# EAGLE board DressCode (EAGLE 6.4)
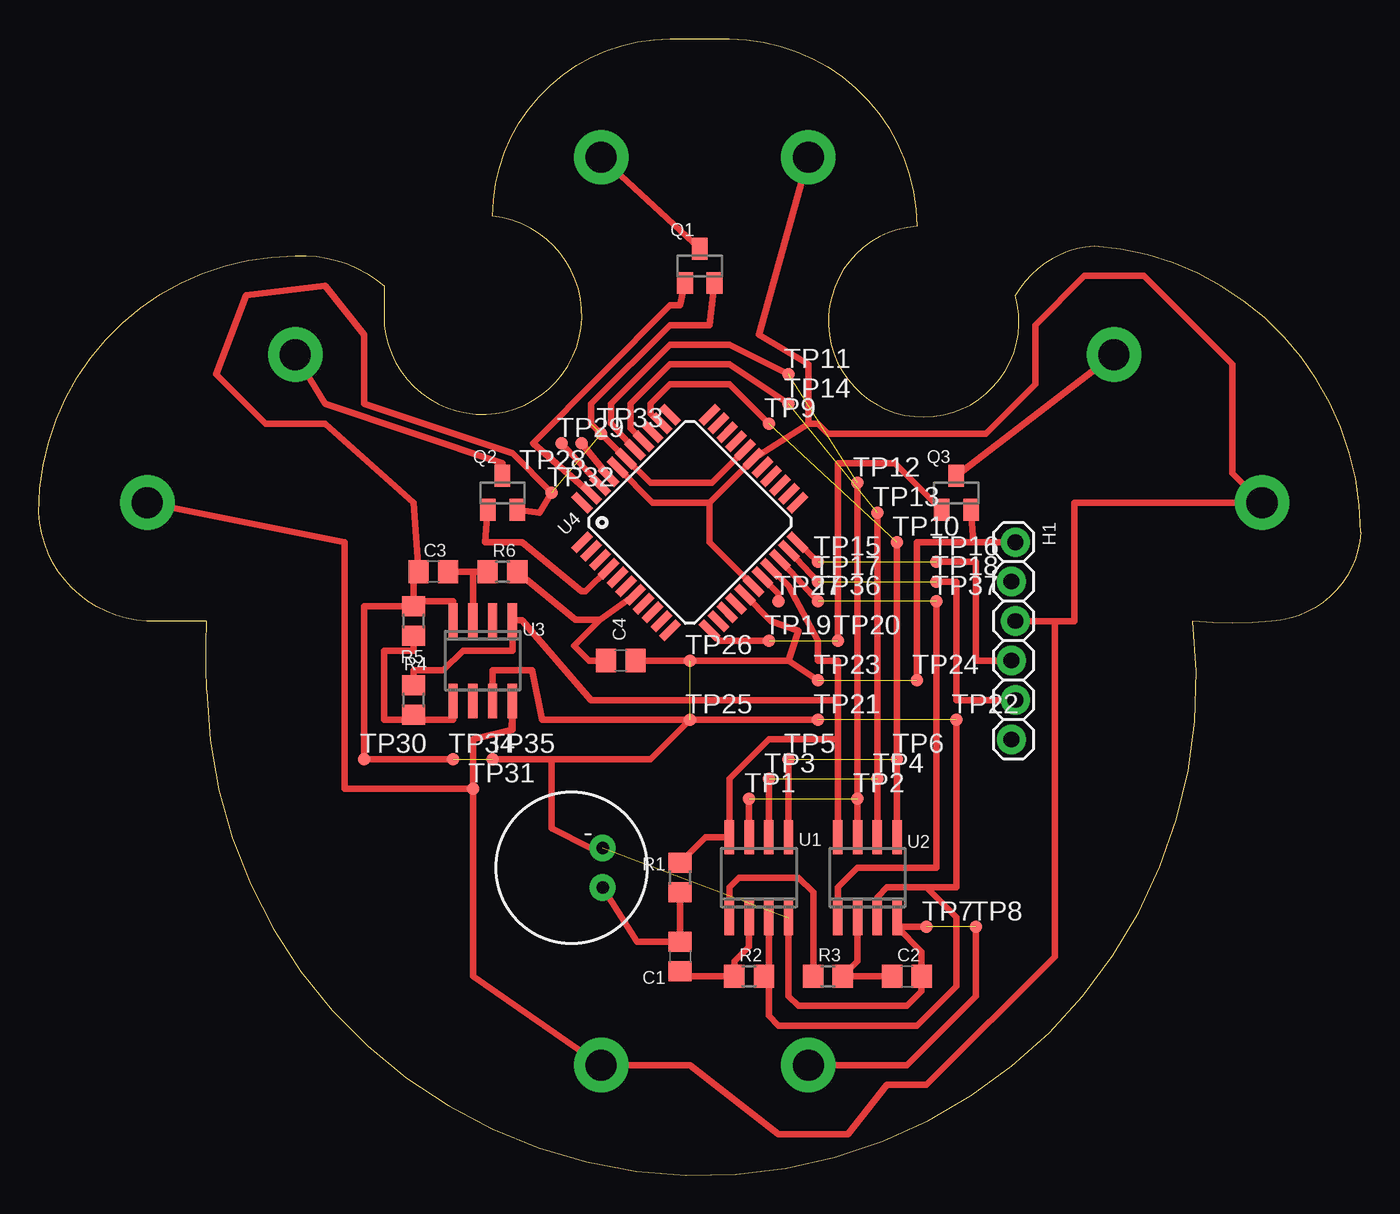
[diagram p0: board, top side]

Size 85.09 x 73.12 mm. Coordinates in mm from the lower left corner, seen from the top.
Outline: 22.22,54.7 arc259 29.21,61.69 arc-90 40.64,73.12 44.45,73.12 arc-90 56.52,61.05 arc282 62.87,56.61 arc-56 67.95,59.78 arc-86 85.09,41.37 arc-83 79.38,35.65 arc-13 74.3,35.65 arc-186 10.8,31.21 arc-2 10.8,35.65 7.62,35.65 arc-90 0,42.64 arc-90 16.51,59.15 arc-44 22.22,57.24 22.22,54.7
Copper layers (1*16): Top 0.035mm / dielectric 1.5mm / Bottom 0.035mm
Design rules "default *": minimum track width 0.2mm, minimum drill 0.5mm, track to track 0.2mm, track to pad 0.4mm, pad to pad 0.2mm, via to via 0.2mm, smd to smd 0.2mm, copper to edge 0.2mm, drill to drill 0.3mm, minimum pad ring 10mil, minimum via ring 8mil, stop-mask expansion 4mil, vias tented up to drill 1mm, thermal gap 0.2mm

## Footprints (pad centres in the part's own frame; a part is rotated, then mirrored left to right if it is on the bottom)
C0805 = smd 1.3 x 1.5: 1 -0.95,0; 2 0.95,0
1X06_LOCK = drill 1.016 pad 1.88: 1 0,0; 2 2.54,-0.254; 3 5.08,0; 4 7.62,-0.254; 5 10.16,0; 6 12.7,-0.254
MIC-9.7MM = drill 0.8 pad 1.676: 1 -2,1.27; 2 -2,-1.27
SOT23 = smd 1 x 1.4: 1 -0.95,-1.1; 2 0.95,-1.1; 3 0,1.1
R0805 = smd 1.3 x 1.5: 1 -0.95,0; 2 0.95,0
TP08R = smd 0.8 x 0.8: TP 0,0
SOIC-8 = smd 0.6 x 2.2: 1 -1.905,-2.6; 2 -0.635,-2.6; 3 0.635,-2.6; 4 1.905,-2.6; 5 1.905,2.6; 6 0.635,2.6; 7 -0.635,2.6; 8 -1.905,2.6
TQFP44 = smd 1.5 x 0.5: 1 -5.8,4; 2 -5.8,3.2; 3 -5.8,2.4; 4 -5.8,1.6; 5 -5.8,0.8; 6 -5.8,0; 7 -5.8,-0.8; 8 -5.8,-1.6; 9 -5.8,-2.4; 10 -5.8,-3.2; 11 -5.8,-4; 23 5.8,-4; 24 5.8,-3.2; 25 5.8,-2.4; 26 5.8,-1.6; 27 5.8,-0.8; 28 5.8,0; 29 5.8,0.8; 30 5.8,1.6; 31 5.8,2.4; 32 5.8,3.2; 33 5.8,4 | smd 0.5 x 1.5: 12 -4,-5.8; 13 -3.2,-5.8; 14 -2.4,-5.8; 15 -1.6,-5.8; 16 -0.8,-5.8; 17 0,-5.8; 18 0.8,-5.8; 19 1.6,-5.8; 20 2.4,-5.8; 21 3.2,-5.8; 22 4,-5.8; 34 4,5.8; 35 3.2,5.8; 36 2.4,5.8; 37 1.6,5.8; 38 0.8,5.8; 39 0,5.8; 40 -0.8,5.8; 41 -1.6,5.8; 42 -2.4,5.8; 43 -3.2,5.8; 44 -4,5.8

## Placement (x,y rotation side)
C1  10u  [C0805]  41.27,14.06 270 top
C2  10n  [C0805]  55.88,12.79 0 top
C3  10u  [C0805]  25.4,38.83 0 top
C4  10u  [C0805]  37.46,33.11 180 top
H1  [1X06_LOCK]  62.87,40.73 270 top
M1  MIC9.7MM  [MIC-9.7MM]  34.29,19.78 180 top
Q1  2N7002  [SOT23]  42.55,58.51 0 top
Q2  2N7002  [SOT23]  29.84,43.91 0 top
Q3  2N7002  [SOT23]  59.05,43.91 0 top
R1  2.2k  [R0805]  41.27,19.14 90 top
R2  2.2k  [R0805]  45.72,12.79 0 top
R3  2.2k  [R0805]  50.8,12.79 0 top
R4  2.2k  [R0805]  24.13,30.57 90 top
R5  2.2k  [R0805]  24.13,35.65 270 top
R6  2.2k  [R0805]  29.84,38.83 180 top
TP1  TPTP08R  [TP08R]  45.72,24.22 0 top
TP2  TPTP08R  [TP08R]  52.7,24.22 0 top
TP3  TPTP08R  [TP08R]  46.99,25.49 0 top
TP4  TPTP08R  [TP08R]  53.98,25.49 0 top
TP5  TPTP08R  [TP08R]  48.26,26.76 0 top
TP6  TPTP08R  [TP08R]  55.24,26.76 0 top
TP7  TPTP08R  [TP08R]  57.15,15.97 0 top
TP8  TPTP08R  [TP08R]  60.32,15.97 0 top
TP9  TPTP08R  [TP08R]  46.99,48.35 0 top
TP10  TPTP08R  [TP08R]  55.24,40.73 0 top
TP11  TPTP08R  [TP08R]  48.26,51.53 0 top
TP12  TPTP08R  [TP08R]  52.7,44.54 0 top
TP13  TPTP08R  [TP08R]  53.98,42.64 0 top
TP14  TPTP08R  [TP08R]  48.26,49.62 0 top
TP15  TPTP08R  [TP08R]  50.16,39.46 0 top
TP16  TPTP08R  [TP08R]  57.78,39.46 0 top
TP17  TPTP08R  [TP08R]  50.16,38.19 0 top
TP18  TPTP08R  [TP08R]  57.78,38.19 0 top
TP19  TPTP08R  [TP08R]  46.99,34.38 0 top
TP20  TPTP08R  [TP08R]  51.44,34.38 0 top
TP21  TPTP08R  [TP08R]  50.16,29.3 0 top
TP22  TPTP08R  [TP08R]  59.05,29.3 0 top
TP23  TPTP08R  [TP08R]  50.16,31.84 0 top
TP24  TPTP08R  [TP08R]  56.52,31.84 0 top
TP25  TPTP08R  [TP08R]  41.91,29.3 0 top
TP26  TPTP08R  [TP08R]  41.91,33.11 0 top
TP27  TPTP08R  [TP08R]  47.62,36.92 0 top
TP28  TPTP08R  [TP08R]  34.92,47.08 180 top
TP29  TPTP08R  [TP08R]  33.66,47.08 0 top
TP30  TPTP08R  [TP08R]  20.95,26.76 0 top
TP31  TPTP08R  [TP08R]  27.94,24.86 0 top
TP32  TPTP08R  [TP08R]  33.02,43.91 0 top
TP33  TPTP08R  [TP08R]  36.2,47.72 0 top
TP34  TPTP08R  [TP08R]  26.67,26.76 0 top
TP35  TPTP08R  [TP08R]  29.21,26.76 0 top
TP36  TPTP08R  [TP08R]  50.16,36.92 0 top
TP37  TPTP08R  [TP08R]  57.78,36.92 0 top
U1  MCP6S21  [SOIC-8]  46.35,19.14 0 top
U2  MCP6S21  [SOIC-8]  53.34,19.14 0 top
U3  MCP6G02  [SOIC-8]  28.57,33.11 180 top
U4  PIC24FV32KA304-I/PT  [TQFP44]  41.91,42 45 top
U$1  [DRESSCODE-OUTLINE1]  0,0.09 0 top

## Library data of the parts
C1-C4 R1-R6 = rcl
H1 M1 = SparkFun
Q1-Q3 = transistor-small-signal
TP1-TP37 = testpad
U1-U4 = x-io
U$1 = hannah

## Nets
ADC: TP36.TP TP37.TP U2.1 U4.20
AVDD: R1.2 R4.2 U1.8 U2.8 U3.1 U4.19
AVDD_REF: C4.2 R6.1 U4.7
CS: TP5.TP TP6.TP TP9.TP TP10.TP U1.5 U2.5 U4.35
FTDI_RX: H1.5 TP17.TP TP18.TP U4.21
FTDI_TX: H1.4 TP15.TP TP16.TP U4.22
GND: C2.2 C3.1 C4.1 H1.1 M1.2 Q1.2 Q2.2 Q3.2 R5.1 TP7.TP TP8.TP TP23.TP TP24.TP TP25.TP TP26.TP TP30.TP TP32.TP TP33.TP TP34.TP TP35.TP U1.4 U2.4 U3.4 U4.16 U4.29 U4.39
LED1: Q1.3
LED2: Q2.3
LED3: Q3.3
MCLR: TP27.TP U4.18
N$1: C1.1 M1.1 R1.1
N$2: C1.2 R2.1 U1.2
N$3: C2.1 R3.2 U2.2
N$4: R3.1 U1.1
N$5: C3.2 R6.2 U3.3
N$6: R4.1 R5.2 U3.5
PGEC: TP29.TP U4.42
PGED: TP28.TP U4.41
PWM1: Q1.1 U4.43
PWM2: Q2.1 U4.4
PWM3: Q3.1 TP19.TP TP20.TP U4.12
SI: TP3.TP TP4.TP TP13.TP TP14.TP U1.6 U2.6 U4.37
SLK: TP1.TP TP2.TP TP11.TP TP12.TP U1.7 U2.7 U4.38
VDD: H1.3 TP31.TP U3.8 U4.17 U4.28 U4.40
VREF: R2.2 TP21.TP TP22.TP U1.3 U2.3 U3.7

## Tracks (layer width: path | path; a pad name or v marks a point on that pad's centre or on a via)
ADC  (1 unrouted)
  Top 0.406: U2.1 51.44,18.51 52.7,19.78 57.78,19.78 TP37.TP | U4.20 TP36.TP
AVDD
  Top 0.406: R1.2 42.92,21.74 U1.8 44.45,25.49 46.99,28.03 51.44,28.03 | 51.44,28.03 U2.8 | U4.19 48.26,37.92 50.16,34.38 50.16,33.11 51.44,33.11 51.44,30.57 | 51.44,30.57 51.44,28.03 | 51.44,30.57 35.56,30.57 31.11,35.71 U3.1 30.48,33.75 27.3,33.75 26.04,32.48 24.13,32.48 R4.2
AVDD_REF
  Top 0.406: U4.7 36.13,35.72 | 36.13,35.72 34.47,34.06 35.42,33.11 C4.2 | R6.1 34.54,35.72 36.13,35.72
CS  (2 unrouted)
  Top 0.406: U1.5 TP5.TP | U2.5 TP6.TP TP10.TP | U4.35 39.99,48.37 39.37,48.99 39.37,49.62 40.64,50.89 44.45,50.89 TP9.TP
FTDI_RX  (1 unrouted)
  Top 0.406: H1.5 59.05,30.57 59.05,38.19 TP18.TP | TP17.TP U4.21
FTDI_TX  (1 unrouted)
  Top 0.406: H1.4 60.32,33.11 60.32,39.46 TP16.TP | U4.22 TP15.TP
GND  (via drill 2 pad 3.5)  (7 unrouted)
  Top 0.406: U2.4 55.24,15.97 | 55.24,15.97 56.83,14.38 C2.2 56.83,11.84 55.88,10.89 48.89,10.89 48.26,11.52 U1.4 | TP7.TP 55.24,15.97 | M1.2 35.56,21.05 33.02,22.32 33.02,26.76 | U4.29 43.32,44.54 39.37,44.54 U4.39 35.56,48.35 35.56,49.62 40.64,54.7 43.18,54.7 Q1.2 | H1.1 60.17,40.73 | 60.17,40.73 Q3.2 | 60.17,40.73 56.52,40.73 TP24.TP | U4.16 47.13,35.65 48.89,35.02 48.26,33.11 | 48.26,33.11 TP23.TP | 48.26,33.11 TP26.TP C4.1 | TP25.TP 39.37,26.76 33.02,26.76 | 33.02,26.76 TP35.TP | R5.1 24.13,38.83 C3.1 24.13,43.27 18.41,48.35 14.61,48.35 11.43,51.53 13.34,56.61 18.41,57.24 20.95,54.07 20.95,49.62 30.48,46.45 TP32.TP 32.23,42.64 Q2.2 | R5.1 24.45,36.92 26.67,36.92 U3.4 26.67,35.02 | R5.1 20.95,36.6 TP30.TP TP34.TP | TP8.TP 60.32,11.52 55.88,7.08 v49.53,7.08
LED1  (via drill 2 pad 3.5)
  Top 0.406: Q1.3 v36.2,65.5
LED2  (via drill 2 pad 3.5)
  Top 0.406: v16.51,52.8 18.41,49.62 29.84,45.81 Q2.3
LED3  (via drill 2 pad 3.5)
  Top 0.406: Q3.3 v69.22,52.8
MCLR
  Top 0.406: U4.18 47.62,37.42 TP27.TP
N$1
  Top 0.406: R1.1 C1.1 38.51,15.01 M1.1
N$2
  Top 0.406: C1.2 41.59,12.79 R2.1 44.77,13.75 45.72,14.7 U1.2
N$3
  Top 0.406: C2.1 R3.2 52.7,13.75 U2.2
N$4
  Top 0.406: R3.1 49.85,18.19 48.89,19.14 45.09,19.14 44.45,18.51 U1.1
N$5
  Top 0.406: U3.3 27.94,38.83 R6.2 C3.2
N$6
  Top 0.406: R5.2 24.13,33.75 22.22,33.75 22.22,29.3 24.13,29.3 | R4.1 24.13,29.3 | 24.13,29.3 26.67,29.3 U3.5
PGEC
  Top 0.406: U4.42 TP29.TP
PGED
  Top 0.406: U4.41 TP28.TP
PWM1
  Top 0.406: Q1.1 41.27,55.97 40.64,55.97 31.83,47.08 U4.43
PWM2
  Top 0.406: Q2.1 28.72,40.73 31.11,40.73 34.92,37.56 35.2,37.56 U4.4
PWM3  (1 unrouted)
  Top 0.406: TP20.TP 51.44,45.81 55.1,45.81 Q3.1 57.94,42.64 | U4.12 43.18,35.02 43.81,34.38 TP19.TP
SI  (2 unrouted)
  Top 0.406: U1.6 TP3.TP | U2.6 TP4.TP TP13.TP | TP14.TP 44.45,52.16 40.64,52.16 38.1,49.62 38.1,48.08 U4.37
SLK  (2 unrouted)
  Top 0.406: U2.7 TP2.TP TP12.TP | U1.7 TP1.TP | U4.38 36.83,48.35 36.83,49.62 40.64,53.43 44.45,53.43 TP11.TP
VDD  (via drill 2 pad 3.5)
  Top 0.406: U4.40 39.51,43.27 43.18,43.27 | 43.18,43.27 U4.28 49.53,48.35 | 43.18,43.27 43.18,40.73 U4.17 | 27.94,28.03 30.42,28.67 U3.8 30.48,28.67 27.94,28.03 | TP31.TP 27.94,12.79 v36.2,7.08 41.91,7.08 47.62,2.63 52.07,2.63 54.61,5.81 57.15,5.81 65.41,14.06 65.41,35.65 | TP31.TP 19.68,24.86 19.68,40.73 v6.99,43.27 | 49.53,48.35 49.53,52.16 46.35,54.07 v49.53,65.5 | H1.3 65.41,35.65 | 65.41,35.65 66.68,35.65 66.68,43.27 v78.74,43.27 76.84,45.18 76.84,52.16 71.12,57.88 67.31,57.88 64.14,54.7 64.14,50.89 60.96,47.72 50.8,47.72 50.16,48.35 49.53,48.35 | 27.94,28.03 TP31.TP
VREF  (1 unrouted)
  Top 0.406: R2.2 46.99,13.11 U1.3 46.99,10.25 47.62,9.62 56.52,9.62 59.05,12.16 59.05,16.6 57.15,18.51 | 57.15,18.51 54.61,18.51 53.98,17.87 U2.3 | 57.15,18.51 59.05,18.51 TP22.TP | U3.7 29.21,32.48 31.75,32.48 32.38,29.3 TP21.TP